# EAGLE board M246X (EAGLE 6.6.0)
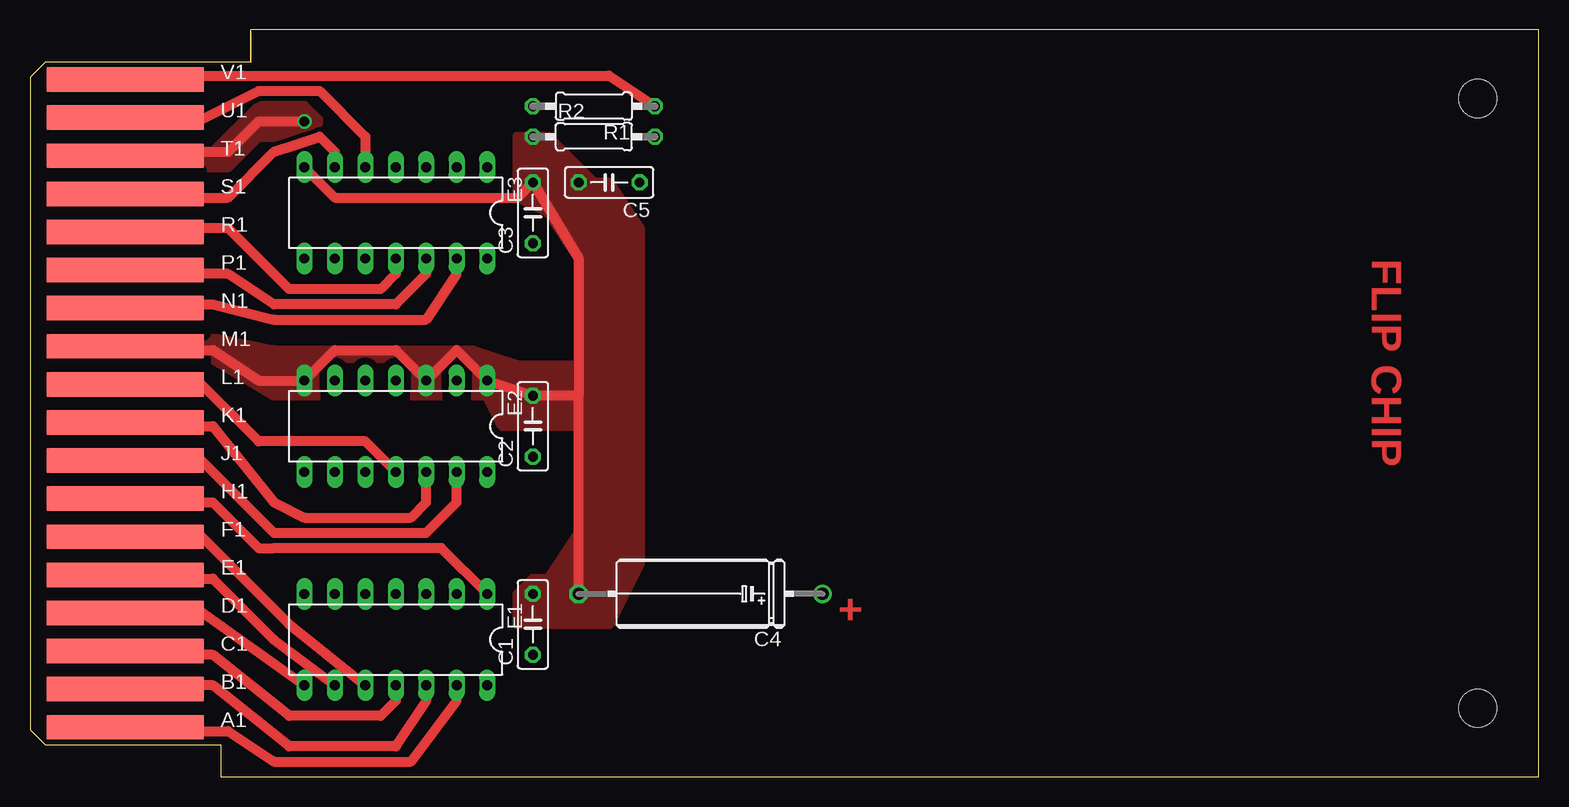
[diagram p0: board, top side]
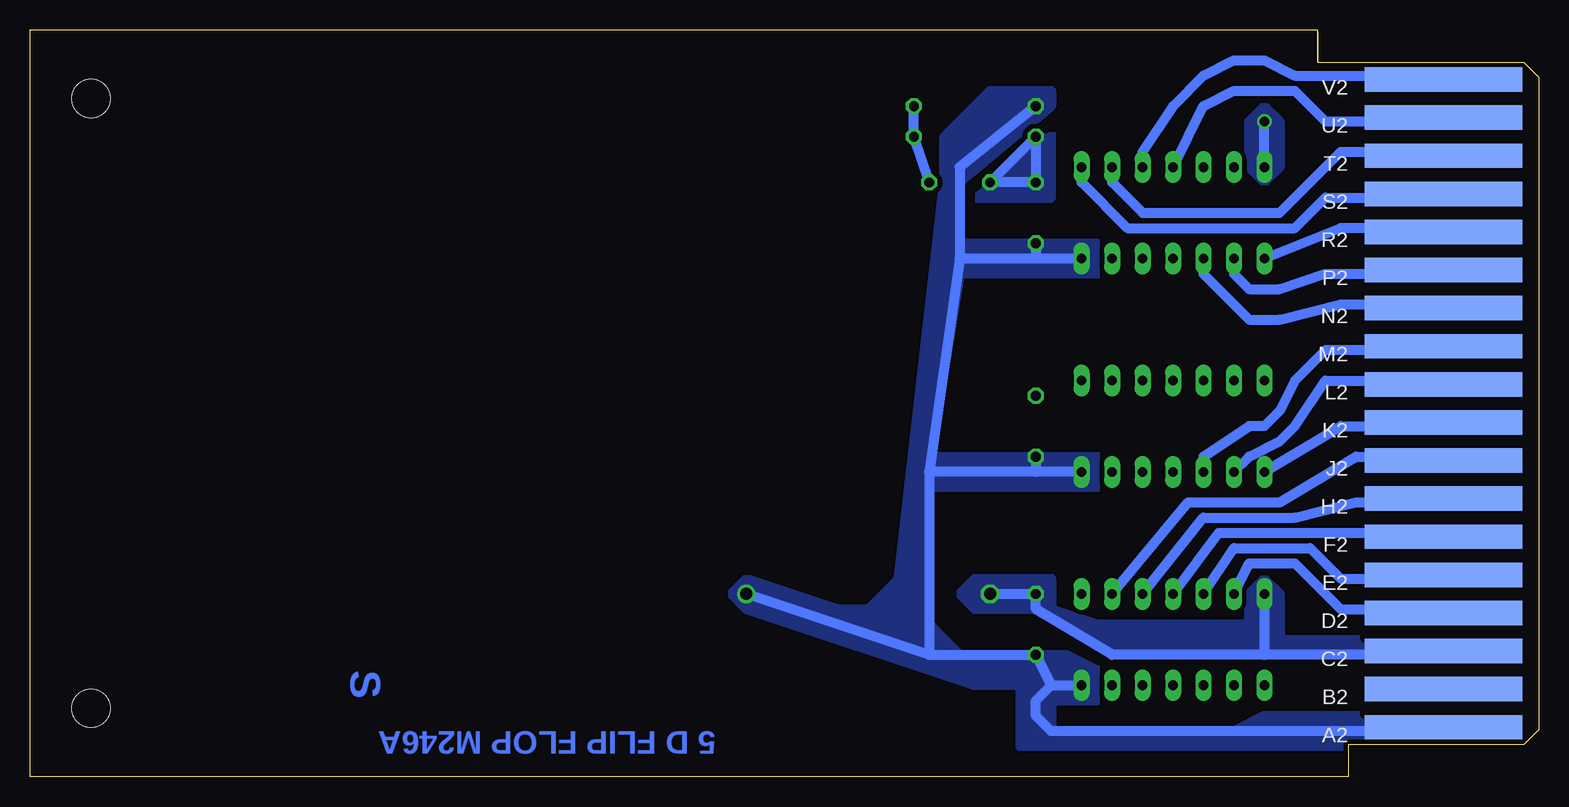
[diagram p1: board, bottom side, seen from below]

Size 125.73 x 62.23 mm. Coordinates in mm from the lower left corner, seen from the top.
Copper layers (1+16): Top 0.035mm / dielectric 1.5mm / Bottom 0.035mm
Design rules "16mils": minimum track width 16mil, minimum drill 32mil, track to track 15mil, track to pad 10mil, pad to pad 10mil, via to via 10mil, smd to smd 10mil, copper to edge 13mil, drill to drill 10mil, minimum pad ring 10mil, minimum via ring 8mil, stop-mask expansion 0mil, vias tented up to drill 0mil, thermal gap 10mil
Net classes: 0 default: width 0.813 mm; 1 Supply: width 0.813 mm

## Footprints (pad centres in the part's own frame; a part is rotated, then mirrored left to right if it is on the bottom)
C050-025X075 = drill 0.813 octagon: 1 -2.54,0; 2 2.54,0
E12-8 = drill 1.016: + -10.16,0 | drill 1.016 octagon: - 10.16,0
DIL14 = drill 0.813 long: 1 -7.62,-3.81; 2 -5.08,-3.81; 3 -2.54,-3.81; 4 0,-3.81; 5 2.54,-3.81; 6 5.08,-3.81; 7 7.62,-3.81; 8 7.62,3.81; 9 5.08,3.81; 10 2.54,3.81; 11 0,3.81; 12 -2.54,3.81; 13 -5.08,3.81; 14 -7.62,3.81
0207/10 = drill 0.813 octagon: 1 -5.08,0; 2 5.08,0
SINGLE = hole 3.175: 120.65,56.515; 120.65,5.715
EDGE-CON2 = smd 13.106 x 2.032: A1 7.938,4.128; B1 7.938,7.303; C1 7.938,10.477; D1 7.938,13.652; E1 7.938,16.828; F1 7.938,20.003; H1 7.938,23.177; J1 7.938,26.352; K1 7.938,29.527; L1 7.938,32.703; M1 7.938,35.877; N1 7.938,39.053; P1 7.938,42.227; R1 7.938,45.403; S1 7.938,48.578; T1 7.938,51.752; U1 7.938,54.928; V1 7.938,58.102 | smd 13.106 x 2.032 bottom: A2 7.938,4.128; B2 7.938,7.303; C2 7.938,10.477; D2 7.938,13.652; E2 7.938,16.828; F2 7.938,20.003; H2 7.938,23.177; J2 7.938,26.352; K2 7.938,29.527; L2 7.938,32.703; M2 7.938,35.877; N2 7.938,39.053; P2 7.938,42.227; R2 7.938,45.403; S2 7.938,48.578; T2 7.938,51.752; U2 7.938,54.928; V2 7.938,58.102

## Placement (x,y rotation side)
C1  .01uF  [C050-025X075]  41.91,12.7 90 top
C2  .01uF  [C050-025X075]  41.91,29.21 90 top
C3  .01uF  [C050-025X075]  41.91,46.99 90 top
C4  39uF  [E12-8]  55.88,15.24 180 top
C5  .01uF  [C050-025X075]  48.26,49.53 180 top
E1  74H74N  [DIL14]  30.48,11.43 180 top
E2  74H74N  [DIL14]  30.48,29.21 180 top
E3  74H74N  [DIL14]  30.48,46.99 180 top
R1  220  [0207/10]  46.99,55.88 180 top
R2  330  [0207/10]  46.99,53.34 0 top
U$1  OUTLINE-SINGLE  [SINGLE]  0,0 0 top
U$2  [EDGE-CON2]  0,0 0 top

## Library data of the parts
C1-C3 C5 R1 R2 = rcl
C4 U$1 U$2 = dec-con
E1-E3 = 74xx-us

## Nets
+3V: C5.1 R1.1 R2.2 U$2.V1
GND [Supply]: C1.2 C2.2 C3.2 C4.- C5.2 E1.7 E2.1 E2.3 E2.7 E3.7 R2.1 U$2.C2 U$2.M1 U$2.T1
N$2: E3.5 U$2.U1
N$3: E1.6 U$2.D2
N$4: E1.5 U$2.E2
N$5: E1.2 U$2.J2
N$6: E1.4 U$2.F2
N$7: E1.3 U$2.H2
N$8: E1.1 U$2.H1
N$9: E3.1 U$2.S2
N$10: E3.3 U$2.V2
N$11: E3.8 U$2.R2
N$12: E3.9 U$2.P2
N$13: E3.4 U$2.U2
N$14: E3.2 U$2.T2
N$15: E2.13 U$2.J1
N$16: E2.11 U$2.L1
N$17: E2.12 U$2.K1
N$18: E2.8 U$2.K2
N$19: E2.9 U$2.L2
N$20: E2.10 U$2.M2
N$21: E1.13 U$2.A1
N$22: E1.11 U$2.C1
N$23: E1.10 U$2.F1
N$24: E1.8 U$2.D1
N$25: E1.9 U$2.E1
N$26: E1.12 U$2.B1
N$27: E3.13 U$2.N1
N$28: E3.11 U$2.R1
N$29: E3.12 U$2.P1
N$30: E3.10 U$2.N2
N$31: E3.6 U$2.S1
VCC [Supply]: C1.1 C2.1 C3.1 C4.+ E1.14 E2.14 E3.14 R1.2 U$2.A2

## Tracks (layer width: path | path; a pad name or v marks a point on that pad's centre or on a via)
+3V
  Top 0.813: U$2.V1 8.89,58.42 48.26,58.42 R1.1
  Bottom 0.813: C5.1 R2.2 R1.1
GND  (via drill 0.81)
  Top 0.813: U$2.M1 8.89,35.56 15.24,35.56 19.05,33.02 E2.7 25.4,35.56 30.48,35.56 E2.3 35.56,35.56 E2.1 C2.2 45.72,31.75 | 45.72,31.75 45.72,43.18 C3.2 40.64,48.26 25.4,48.26 E3.7 | C4.- 45.72,31.75 | U$2.T1 10.16,52.07 16.51,52.07 19.05,54.61 v22.86,54.61
  Bottom 0.813: E3.7 v22.86,54.61 | U$2.C2 10.16,10.16 22.86,10.16 | 22.86,10.16 35.56,10.16 41.91,13.97 C1.2 C4.- | E1.7 22.86,10.16 | R2.1 C3.2 C5.2 R2.1
  pour Bottom (no thermals): 21.59,54.61 21.59,50.8 22.86,49.53 24.13,50.8 24.13,54.61 22.86,55.88
  pour Bottom (isolate 0.813, rank 2, no thermals): 40.64,54.61 41.91,54.61 46.99,49.53 46.99,48.26 40.64,48.26
  pour Bottom (isolate 0.406, no thermals): 12.7,10.16 35.56,10.16 41.91,13.97 46.99,13.97 48.26,15.24 46.99,16.51 40.64,16.51 40.64,13.97 36.83,12.7 24.13,12.7 24.13,15.24 22.86,16.51 21.59,15.24 21.59,11.43 12.7,11.43
  pour Top (isolate 0.254, no thermals): 12.7,50.8 16.51,50.8 19.05,53.34 22.86,53.34 24.13,54.61 22.86,55.88 19.05,55.88 15.24,52.07 12.7,52.07
  pour Top (isolate 0.61, no thermals): 40.64,15.24 41.91,16.51 43.18,16.51 45.72,20.32 45.72,29.21 39.37,29.21 38.1,31.75 20.32,31.75 13.97,35.56 13.97,36.83 20.32,35.56 36.83,35.56 40.64,34.29 45.72,34.29 45.72,43.18 43.18,46.99 40.64,48.26 40.64,53.34 43.18,53.34 46.99,49.53 48.26,49.53 50.8,45.72 50.8,17.78 48.26,12.7 40.64,12.7
N$2
  Top 0.813: U$2.U1 8.89,54.61 13.97,54.61 19.05,57.15 24.13,57.15 27.94,53.34 E3.5
N$3
  Bottom 0.813: E1.6 24.13,17.78 20.32,17.78 16.51,13.97 8.89,13.97 U$2.D2
N$4
  Bottom 0.813: E1.5 25.4,19.05 19.05,19.05 16.51,16.51 8.89,16.51 U$2.E2
N$5
  Bottom 0.813: E1.2 29.21,22.86 21.59,22.86 15.24,26.67 8.89,26.67 U$2.J2
N$6
  Bottom 0.813: E1.4 26.67,20.32 8.89,20.32 U$2.F2
N$7
  Bottom 0.813: E1.3 27.94,21.59 20.32,21.59 15.24,22.86 8.89,22.86 U$2.H2
N$8
  Top 0.813: U$2.H1 8.89,22.86 15.24,22.86 19.05,19.05 20.32,19.05 34.29,19.05 E1.1
N$9
  Bottom 0.813: E3.1 38.1,49.53 34.29,45.72 20.32,45.72 17.78,48.26 8.89,48.26 U$2.S2
N$10
  Bottom 0.813: E3.3 33.02,52.07 30.48,55.88 27.94,58.42 25.4,59.69 22.86,59.69 20.32,58.42 8.89,58.42 U$2.V2
N$11
  Bottom 0.813: U$2.R2 8.89,45.72 16.51,45.72 E3.8
N$12
  Bottom 0.813: E3.9 25.4,41.91 24.13,40.64 21.59,40.64 17.78,41.91 8.89,41.91 U$2.P2
N$13
  Bottom 0.813: E3.4 27.94,55.88 25.4,57.15 20.32,57.15 17.78,54.61 8.89,54.61 U$2.U2
N$14
  Bottom 0.813: E3.2 35.56,49.53 33.02,46.99 21.59,46.99 16.51,52.07 8.89,52.07 U$2.T2
N$15
  Top 0.813: U$2.J1 8.89,26.67 13.97,26.67 20.32,20.32 33.02,20.32 35.56,22.86 E2.13
N$16
  Top 0.813: E2.11 27.94,27.94 19.05,27.94 13.97,33.02 8.89,33.02 U$2.L1
N$17
  Top 0.813: U$2.K1 8.89,29.21 15.24,29.21 20.32,22.86 22.86,21.59 31.75,21.59 33.02,22.86 E2.12
N$18
  Bottom 0.813: E2.8 16.51,29.21 8.89,29.21 U$2.K2
N$19
  Bottom 0.813: E2.9 24.13,26.67 21.59,27.94 20.32,29.21 17.78,33.02 8.89,33.02 U$2.L2
N$20
  Bottom 0.813: U$2.M2 8.89,35.56 17.78,35.56 20.32,33.02 21.59,30.48 22.86,29.21 24.13,29.21 27.94,26.67 E2.10
N$21
  Top 0.813: U$2.A1 8.89,3.81 16.51,3.81 20.32,1.27 31.75,1.27 35.56,6.35 E1.13
N$22
  Top 0.813: E1.11 30.48,6.35 29.21,5.08 21.59,5.08 15.24,10.16 8.89,10.16 U$2.C1
N$23
  Top 0.813: U$2.F1 8.89,20.32 13.97,20.32 21.59,12.7 E1.10
N$24
  Top 0.813: U$2.D1 8.89,13.97 13.97,13.97 E1.8
N$25
  Top 0.813: U$2.E1 8.89,16.51 15.24,16.51 20.32,11.43 E1.9
N$26
  Top 0.813: E1.12 33.02,6.35 30.48,2.54 21.59,2.54 15.24,7.62 8.89,7.62 U$2.B1
N$27
  Top 0.813: U$2.N1 8.89,39.37 15.24,39.37 20.32,38.1 33.02,38.1 35.56,41.91 E3.13
N$28
  Top 0.813: E3.11 30.48,41.91 29.21,40.64 21.59,40.64 16.51,45.72 8.89,45.72 U$2.R1
N$29
  Top 0.813: E3.12 33.02,41.91 30.48,39.37 20.32,39.37 16.51,41.91 8.89,41.91 U$2.P1
N$30
  Bottom 0.813: E3.10 27.94,41.91 24.13,38.1 21.59,38.1 16.51,39.37 8.89,39.37 U$2.N2
N$31
  Top 0.813: U$2.S1 8.89,48.26 16.51,48.26 20.32,52.07 24.13,53.34 25.4,52.07 E3.6
VCC
  Bottom 0.813: U$2.A2 8.89,3.81 40.64,3.81 41.91,5.08 41.91,6.35 40.64,7.62 | 40.64,7.62 C1.1 50.8,10.16 | 40.64,7.62 E1.14 | C4.+ 50.8,10.16 | E2.14 41.91,25.4 | 41.91,25.4 50.8,25.4 | 50.8,25.4 50.8,10.16 | E3.14 41.91,43.18 | 41.91,43.18 48.26,43.18 | 48.26,43.18 50.8,25.4 | R1.2 48.26,50.8 48.26,43.18 | C2.1 41.91,25.4 | C3.1 41.91,43.18
  pour Bottom (isolate 0.406, no thermals): 12.7,2.54 43.18,2.54 43.18,7.62 46.99,7.62 66.04,13.97 67.31,15.24 66.04,16.51 58.42,13.97 55.88,13.97 53.34,16.51 49.53,49.53 49.53,53.34 45.72,57.15 40.64,57.15 40.64,55.88 48.26,49.53 48.26,44.45 36.83,44.45 36.83,41.91 48.26,41.91 50.8,26.67 36.83,26.67 36.83,24.13 50.8,24.13 50.8,12.7 48.26,10.16 39.37,10.16 36.83,8.89 36.83,6.35 40.64,6.35 40.64,3.81 25.4,3.81 22.86,5.08 12.7,5.08

## Text on the board
Top: FLIP CHIP | +
Bottom: S | 5 D FLIP FLOP M246A